# EAGLE board GPS_radiologger_v17 (EAGLE 9.6.2)
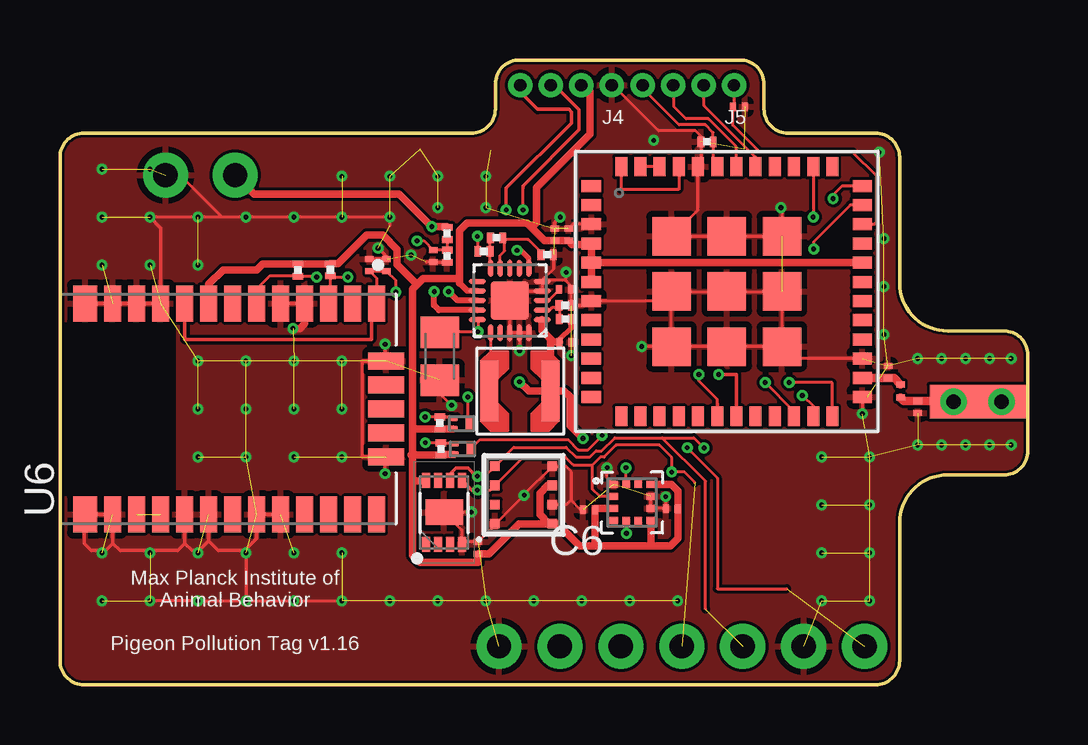
[diagram p0: board, top side]
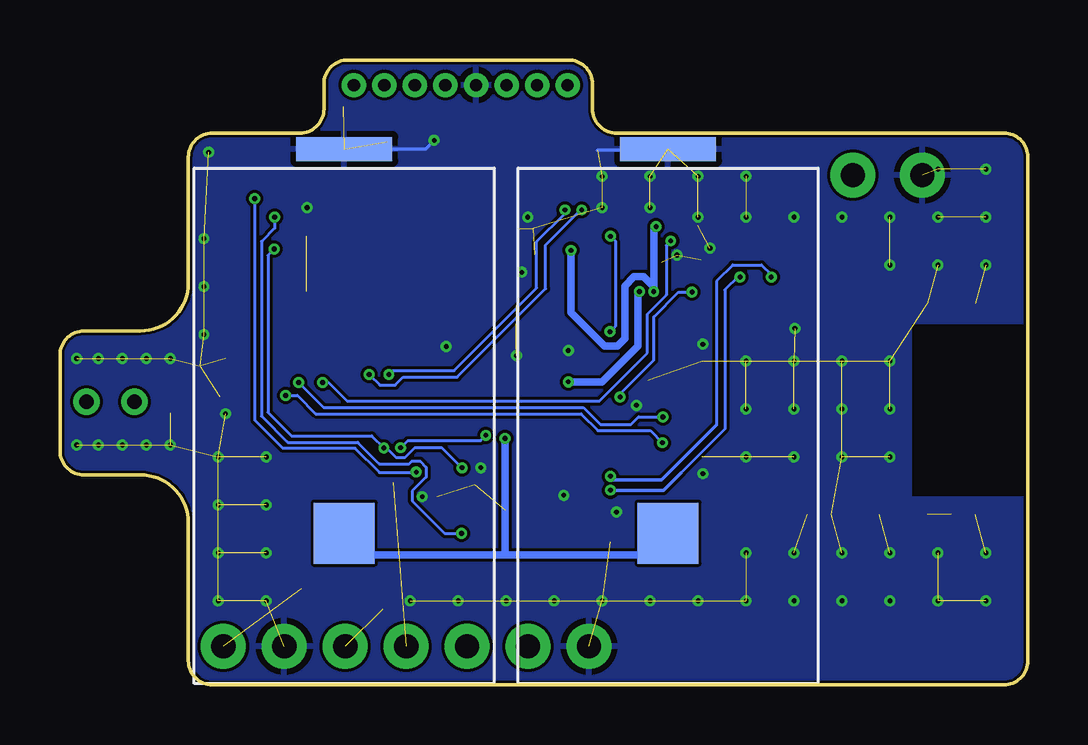
[diagram p1: board, bottom side, seen from below]

Size 40.35 x 26.05 mm. Coordinates in mm from the lower left corner, seen from the top.
Outline: 34,0 1,0 arc-90 0,1 0,22 arc-90 1,23 17.15,23 arc90 18.15,24 18.15,25.05 arc-90 19.15,26.05 28.35,26.05 arc-90 29.35,25.05 29.35,24 arc90 30.35,23 34,23 arc-90 35,22 35,16.75 arc90 37,14.75 39.35,14.75 arc-90 40.35,13.75 40.35,9.75 arc-90 39.35,8.75 37,8.75 arc90 35,6.75 35,1 arc-90 34,0
Copper layers (1*16): Top 0.035mm / dielectric 0.2mm / Bottom 0.035mm
Design rules "default *": minimum track width 5mil, minimum drill 0.2mm, track to track 5mil, track to pad 5mil, pad to pad 5mil, via to via 5mil, smd to smd 5mil, copper to edge 4mil, drill to drill 4mil, minimum pad ring 10mil, minimum via ring 5mil, stop-mask expansion 0mil, vias tented up to drill 12mil, thermal gap 10mil
Net classes: 1 power: width 0.305 mm; 2 antenna: width 0.356 mm, clearance 0.178 mm; 3 battery: width 0.254 mm

## Footprints (pad centres in the part's own frame; a part is rotated, then mirrored left to right if it is on the bottom)
C0201 = smd 0.25 x 0.35: 1 -0.25,0; 2 0.25,0
L0201 = smd 0.25 x 0.35: 1 -0.275,0; 2 0.275,0
C0805K = smd 1.3 x 1.6: 1 -1,0; 2 1,0
SON50P300X200X55-9N = smd 0.63 x 0.32: 1 -1.33,0.75; 2 -1.33,0.25; 3 -1.33,-0.25; 4 -1.33,-0.75; 5 1.33,-0.75; 6 1.33,-0.25; 7 1.33,0.25; 8 1.33,0.75 | smd 1.06 x 1.56: 9 0,0
1X01_NO_SILK = drill 1.016 pad 1.88: 1 0,0
1X04_1.27MM_NO_SILK = drill 0.508 pad 1: 1 0,0; 2 1.27,0; 3 2.54,0; 4 3.81,0
1X07_NO_SILK = drill 1.016 pad 1.88: 1 0,0; 2 2.54,0; 3 5.08,0; 4 7.62,0; 5 10.16,0; 6 12.7,0; 7 15.24,0
SOT883(B) = smd 0.4 x 0.25: 1 -0.35,0.225; 2 -0.35,-0.225 | smd 0.4 x 0.7: 3 0.35,0
R0201 = smd 0.28 x 0.43: 1 -0.255,0; 2 0.255,0
TYPEABZ = smd 0.8 x 0.5: P$1 -5.65,4.4; P$2 -5.65,3.6; P$3 -5.65,2.8; P$4 -5.65,2; P$5 -5.65,1.2; P$6 -5.65,0.4; P$7 -5.65,-0.4; P$8 -5.65,-1.2; P$9 -5.65,-2; P$10 -5.65,-2.8; P$11 -5.65,-3.6; P$12 -5.65,-4.4; P$25 5.65,-4.4; P$26 5.65,-3.6; P$27 5.65,-2.8; P$28 5.65,-2; P$29 5.65,-1.2; P$30 5.65,-0.4; P$31 5.65,0.4; P$32 5.65,1.2; P$33 5.65,2; P$34 5.65,2.8; P$35 5.65,3.6; P$36 5.65,4.4 | smd 0.5 x 0.8: P$13 -4.4,-5.2; P$14 -3.6,-5.2; P$15 -2.8,-5.2; P$16 -2,-5.2; P$17 -1.2,-5.2; P$18 -0.4,-5.2; P$19 0.4,-5.2; P$20 1.2,-5.2; P$21 2,-5.2; P$22 2.8,-5.2; P$23 3.6,-5.2; P$24 4.4,-5.2; P$37 4.4,5.2; P$38 3.6,5.2; P$39 2.8,5.2; P$40 2,5.2; P$41 1.2,5.2; P$42 0.4,5.2; P$43 -0.4,5.2; P$44 -1.2,5.2; P$45 -2,5.2; P$46 -2.8,5.2; P$47 -3.6,5.2; P$48 -4.4,5.2 | smd 1.6 x 1.6: P$49 -2.3,2.3; P$50 0,2.3; P$51 2.3,2.3; P$52 -2.3,0; P$53 0,0; P$54 2.3,0; P$55 -2.3,-2.3; P$56 0,-2.3; P$57 2.3,-2.3
XDCR_BMA400 = smd 0.35 x 0.3: 1 -0.775,0.75; 2 -0.775,0.25; 3 -0.775,-0.25; 4 -0.775,-0.75; 7 0.775,-0.75; 8 0.775,-0.25; 9 0.775,0.25; 10 0.775,0.75 | smd 0.3 x 0.35: 5 -0.25,-0.775; 6 0.25,-0.775; 11 0.25,0.775; 12 -0.25,0.775
SPV1050 = smd 0.7 x 0.2: P$1 -1.35,0.8; P$2 -1.35,0.4; P$3 -1.35,0; P$4 -1.35,-0.4; P$5 -1.35,-0.8; P$11 1.35,-0.8; P$12 1.35,-0.4; P$13 1.35,0; P$14 1.35,0.4; P$15 1.35,0.8 | smd 0.2 x 0.7: P$6 -0.8,-1.35; P$7 -0.4,-1.35; P$8 0,-1.35; P$9 0.4,-1.35; P$10 0.8,-1.35; P$16 0.8,1.35; P$17 0.4,1.35; P$18 0,1.35; P$19 -0.4,1.35; P$20 -0.8,1.35 | smd 1.6 x 1.6: P$21 0,0
LGA3.0X3.0 = smd 0.4 x 0.4: 1 1.2,1.2; 2 1.2,0.4; 3 1.2,-0.4; 4 1.2,-1.2; 5 -1.2,-1.2; 6 -1.2,-0.4; 7 -1.2,0.4; 8 -1.2,1.2
LCC100P960X1400X210-31N = smd 1.5 x 0.7: 1 4.4,-6.2; 2 4.4,-5.2; 3 4.4,-4.2; 4 4.4,-3.2; 5 4.4,-2.2; 6 4.4,-1.2; 7 4.4,-0.2; 8 4.4,0.8; 9 4.4,1.8; 10 4.4,2.8; 11 4.4,3.8; 12 4.4,4.8; 15 -4.4,4.8; 16 -4.4,3.8; 17 -4.4,2.8; 18 -4.4,1.8; 19 -4.4,0.8; 20 -4.4,-0.2; 21 -4.4,-1.2; 22 -4.4,-2.2; 23 -4.4,-3.2; 24 -4.4,-4.2; 25 -4.4,-5.2; 26 -4.4,-6.2 | smd 1.5 x 1: 13 4.4,5.95; 14 -4.4,5.95 | smd 0.7 x 1.5: 27 -2,-6.6; 28 -1,-6.6; 29 0,-6.6; 30 1,-6.6; 31 2,-6.6
LPS_3015 = smd 0.75 x 2.54: P$1 -1.3,0; P$2 1.25,0
ICARUS_NITINOL_ANTENNA_SHORT = smd 4 x 1.4: 1 0,0 | drill 0.6: 2 -1,0; 3 1,0
ICARUS_FULL_TOP = smd 2.54 x 2.54: P$1 0,-4.48 | smd 4 x 1: P$2 0,11.538

## Placement (x,y rotation side)
C1  0.1 uF  [C0201]  28.3,24.1 0 top
C2  47 uF  [C0201]  13.6,17.5 90 top
C3  0.1 uF  [C0201]  17.42,5.71 90 top
C4  10nF  [C0201]  21.05,16.48 0 top
C5  100 nF  [C0201]  12.9,17.5 90 top
C6  [C0201]  22.05,7.3 180 top
C7  0.1 uF  [C0201]  15.56,17.87 270 top
C8  [C0201]  25.51,7.35 180 top
C9  1 uF  [C0201]  20.62,18.77 270 top
C10  0.1 uF  [C0201]  21.2,18.77 270 top
C11  0.1uF  [L0201]  35.04,12.25 90 top
C13  47 uF  [C0805K]  15.83,13.7 270 top
C14  4.7 uF  [C0201]  21.08,14.28 0 top
IC4  CAT24M01HU5I-GT3  [SON50P300X200X55-9N]  16.01,7.19 90 top
J1  [1X01_NO_SILK]  7.3,21.25 0 top
J3  [1X01_NO_SILK]  4.4,21.25 0 top
J4  [1X04_1.27MM_NO_SILK]  23,25 180 top
J5  [1X04_1.27MM_NO_SILK]  28.1,25 180 top
J7  [1X07_NO_SILK]  18.3,1.6 0 top
L3  [C0201]  34.52,13.03 90 top
L4  [C0201]  35.76,11.58 270 top
PDTA143TMB,1  TINYPICO-PNPAMB  [SOT883(B)]  16.78,9.83 0 top
PDTA143TMB,315  TINYPICO-PNPAMB  [SOT883(B)]  16.74,10.89 0 top
R1  4.7 k  [R0201]  11.27,17.3 90 top
R2  4.7 k  [R0201]  9.92,17.29 90 top
R3  10k  [R0201]  26.97,22.64 0 top
R4  100k  [R0201]  15.83,10.91 270 top
R5  100k  [R0201]  15.88,9.83 270 top
R6  10 M  [R0201]  16.14,17.87 90 top
R7  4.7 M  [R0201]  16.14,18.82 90 top
R8  3M  [R0201]  21.07,15.25 0 top
R9  9.1M  [R0201]  21.06,15.82 180 top
R10  6.2M  [R0201]  17.67,18.07 180 top
R11  1M  [R0201]  18.2,18.64 180 top
R12  3M  [R0201]  20.31,17.93 180 top
U1  TYPEABZ  [TYPEABZ]  27.8,16.4 0 top
U2  BMA400  [XDCR_BMA400]  23.85,7.6 0 top
U4  SPV1050  [SPV1050]  18.75,16.02 180 top
U5  BME680BME680  [LGA3.0X3.0]  19.33,7.91 180 top
U6  CAM-M8Q-0  [LCC100P960X1400X210-31N]  7,11.5 90 top
U$1  LPS3015  [LPS_3015]  19.14,12.24 180 top
U$2  NITINOL_ANTENNA_SHORT  [ICARUS_NITINOL_ANTENNA_SHORT]  38.25,11.8 0 top
U$3  ICARUS_V4_RAW  [ICARUS_FULL_TOP]  28.5,10.8 0 bottom
U$4  ICARUS_V4_RAW  [ICARUS_FULL_TOP]  15,10.8 0 bottom

## Library data of the parts
C1-C10 C13 C14 L3 L4 = rcl; SPICEPREFIX: C
C11 = rcl; SPICEPREFIX: L
IC4 = CAT24M01HU5I-GT3-CorrectedV2; ALLIED_NUMBER: 70300250; ALLIED_PRICE-STOCK: http://www.alliedelec.com/on-semiconductor-cat24m01hu5i-gt3/70300250/; DESCRIPTION: EEPROM 1MB I2C SERIAL EEPROM; HEIGHT: 0.55mm; MANUFACTURER_NAME: ON Semiconductor; MANUFACTURER_PART_NUMBER: CAT24M01HU5I-GT3; MOUSER_PART_NUMBER: 863-CAT24M01HU5I-GT3; MOUSER_PRICE-STOCK: https://www.mouser.com/Search/Refine.aspx?Keyword=863-CAT24M01HU5I-GT3; RS_PART_NUMBER: 7814831P; RS_PRICE-STOCK: http://uk.rs-online.com/web/p/products/7814831P
J1 J3-J5 J7 = SparkFun-Connectors
PDTA143TMB,1 PDTA143TMB,315 = UnexpectedMaker
R1-R12 = rcl; SPICEPREFIX: R
U1 = Kris
U2 = BMA400; AVAILABILITY: Unavailable; DESCRIPTION: Accelerometer X, Y, Z Axis ±2g, 4g, 8g, 16g 12-LGA (2x2); MF: Bosch Sensortec; MP: BMA400; PACKAGE: LGA-12 Bosch Tools; PRICE: None
U4 = STM-SPV1050_V2
U5 = SparkFun-Sensors; PROD_ID: IC-14656
U6 = CAM-M8Q-0; AVAILABILITY: Unavailable; DESCRIPTION: CAM-M8 RF Receiver BeiDou, GLONASS, GNSS, GPS 1.575GHz -167dBm On-Board, Chip Module; MF: U-Blox America; MP: CAM-M8Q-0; PACKAGE: SMD-31 u-blox; PRICE: None
U$1 = coilcraft_custom
U$2 = Antenna_mounts
U$3 U$4 = TrisolX_Solar_Cells

## Nets
ACC_INT: U1.P$38 U2.5
BAT [battery]: J1.1 R7.2 U4.P$6 U4.P$14
BOOT: J5.4 R3.2 U1.P$43
DM: U1.P$2
DP: U1.P$1
GND: C1.2 C2.2 C3.2 C4.2 C5.2 C6.2 C7.2 C8.2 C9.1 C10.1 C13.2 C14.2 IC4.4 IC4.9 J3.1 J4.1 J7.1 J7.6 L3.2 L4.2 R3.1 R6.1 R9.1 R12.1 U1.P$3 U1.P$7 U1.P$25 U1.P$27 U1.P$44 U1.P$49 U1.P$50 U1.P$51 U1.P$52 U1.P$53 U1.P$54 U1.P$55 U1.P$56 U1.P$57 U2.1 U2.8 U2.9 U4.P$4 U4.P$5 U4.P$18 U4.P$19 U4.P$20 U4.P$21 U5.1 U5.5 U5.7 U6.4 U6.5 U6.10 U6.11 U6.12 U6.13 U6.14 U6.15 U6.18 U6.19 U6.21 U6.22 U6.27 U6.31 U$3.P$2 U$4.P$2
N$1: U1.P$45 U1.P$48
N$2 [antenna]: C11.2 L3.1 U1.P$26
N$4: U4.P$16 U$1.P$2
N$6: R8.1 R9.2 U4.P$2
N$7 [battery]: C14.1 R8.2 U4.P$1 U4.P$13 U$1.P$1 U$3.P$1 U$4.P$1
N$8: R10.1 R11.2 U4.P$10
N$9: R11.1 R12.2 U4.P$9
N$11 [antenna]: C11.1 L4.1 U$2.1 U$2.2 U$2.3
N$12: C13.1 R10.2 U4.P$15
N$13: C4.1 U4.P$3
N$16: U6.16 U6.17
POWER [power]: C3.1 C6.1 C8.1 C9.2 C10.2 IC4.8 J4.2 PDTA143TMB,1.2 PDTA143TMB,315.2 R1.2 R2.2 R4.2 R5.2 U1.P$4 U1.P$5 U1.P$6 U1.P$32 U2.3 U2.7 U2.10 U4.P$12 U5.6 U5.8 U6.8
PWM: J7.2
RDY: J7.3
RST: C1.1 J5.1 U1.P$34
RX: J4.3 U1.P$18
SCD_PDTA: PDTA143TMB,1.1 R5.1 U1.P$23
SCD_PWR: J7.7 PDTA143TMB,1.3
SCL: IC4.6 J7.5 R2.1 U1.P$35 U2.12 U5.4 U6.6
SDA: IC4.5 J7.4 R1.1 U1.P$36 U2.2 U5.3 U6.3
SWDCLK: J5.3 U1.P$42
SWDIO: J5.2 U1.P$41
TCXO_OUT: U1.P$46 U1.P$47
TX: J4.4 U1.P$19
VBUS: U1.P$20
VOLT_MEAS: C7.1 R6.2 R7.1 U1.P$22
ZOE_PDTA: PDTA143TMB,315.1 R4.1 U1.P$24
ZOE_PWR: C2.1 C5.1 PDTA143TMB,315.3 U6.1 U6.9

## Tracks (layer width: path | path; a pad name or v marks a point on that pad's centre or on a via)
ACC_INT  (via drill 0.2)
  Top 0.127: U1.P$38 v31.4,19.5 | U2.5 v23.6,6.32 v23.61,6.31
  Bottom 0.127: v31.4,19.5 31.4,19.03 31.95,18.48 31.95,11.2 30.86,10.11 27.94,10.11 27.04,9.21 25.79,9.21 25.68,9.32 25.34,9.32 25.08,9.07 25.08,8.66 25.67,8.08 25.67,7.67 24.31,6.31 v23.61,6.31
BAT  (via drill 0.2)
  Top 0.127: 15.53,19.07 v15.5,19.1
  Top 0.203: v19.05,18.11 19.2,18.11 19.55,17.77 U4.P$6 | v15.59,16.39 v15.6,16.4
  Top 0.254: U4.P$14 15.8,15.62 15.59,15.83 v15.59,16.39
  Top 0.305: J1.1 8.1,20.45 14.13,20.45 15.51,19.07 15.53,19.07 | v15.5,19.1 16.11,19.1 R7.2
  Bottom 0.127: v15.6,16.4 v15.61,16.4
  Bottom 0.305: v15.5,19.1 15.6,19 v15.6,16.4 15.6,16.58 16.03,17.01 16.42,17.01 16.8,16.63 16.8,14.44 17.11,14.13 17.66,14.13 19.05,15.52 v19.05,18.11
BOOT
  Top 0.127: U1.P$43 27.23,21.6 R3.2 27.23,23.02 26.9,23.35 25.8,23.35 24.3,24.85 24.3,25.19 J5.4
GND  (via drill 0.2)  (84 unrouted)
  Top 0.127: C4.2 21.35,16.48 | 21.95,15.8 U1.P$7 25.1,16 U1.P$52 | R9.1 21.32,16.46 C4.2 | U4.P$20 U4.P$19 | U4.P$19 U4.P$18 U4.P$21 19.11,16.39 | R12.1 20.57,17.33 20.1,16.86 U4.P$5 | 19.15,16.42 19.11,16.39 | U4.P$5 20.15,16.87 21.05,16.87 | 21.05,16.87 21.1,16.87 v21.1,17.2 | 21.05,16.87 21.3,16.62 C4.2 | C5.2 C2.2 13.63,17.72 | 20.53,7.57 U5.7 21.1,7.5 21.3,7.7 | U1.P$52 U1.P$53 U1.P$54 U1.P$57 | U1.P$57 U1.P$56 U1.P$55 | U1.P$55 U1.P$52 | IC4.9 16.76,6.44 IC4.4 16.86,5.96 C3.2 18.13,6.67 U5.1 18.16,6.71 v19.35,7.9 19.35,7.93 U5.5 21.09,9.11 21.3,8.9 21.3,7.7 | 16.14,7.06 IC4.9 | C10.1 21.39,19.2 U1.P$3 | v3.75,3.5 v5.75,3.5 v7.75,3.5 v9.75,3.5 v11.75,3.5 | R6.1 C7.2 15.27,17.62 | J4.1 23.05,25.15 23.05,25 24.96,23.09 26.5,23.09 26.7,22.89 26.7,22.66 R3.1 26.71,21.6 U1.P$44 26.6,19.8 U1.P$49 U1.P$50 U1.P$51 30.1,19.85 v30.05,19.9 | 19.11,16.39 20.07,16.39 U4.P$4 U4.P$5 | v21.33,13.73 v21.32,13.72 | 16.15,12.38 C13.2 15.83,12.14 v16.32,11.65 | U1.P$25 | U1.P$25 v33.45,11.3 | U1.P$55 v24.25,14.1 | v17.15,7.2 17.14,7.19 IC4.9 | v13.55,8.8 13.55,9.45 13.5,9.5 | U1.P$27 30.6,13.6 U1.P$57 | v7.75,19.5 v9.75,19.5 v11.75,19.5 v13.75,19.5 13.75,19.13 | v7.75,19.5 v5.75,19.5 v3.75,19.5 | v7.75,19.5 6.75,19.5 4.97,21.28 J3.1 | 33.66,12 U1.P$25 | U4.P$19 v19.16,13.93 | U2.9 U2.8 C8.2 v25.26,7.83 v25.25,7.84 | C6.2 21.7,7.3 21.3,7.7 | U2.1 22.81,8.62 v22.81,9.05
  Top 0.152: U6.27 13.5,9.5 12.6,9.5 12.6,13.5 U6.31 13.55,13.5 v13.55,14.2 | U6.22 U6.21 8.2,6.1 7.7,5.6 | 7.7,5.6 6.6,5.6 6.2,6 | 6.2,6 U6.19 | 6.2,6 5.8,5.6 5.5,5.6 5.2,5.9 | 5.2,5.9 U6.18 | 5.2,5.9 4.9,5.6 2.5,5.6 2.2,5.9 | 2.2,5.9 U6.15 U6.14 1,7.05 1,5.9 1.3,5.6 1.9,5.6 2.2,5.9 | U6.13 U6.12 U6.11 U6.10 4.2,19.05 v3.75,19.5 | U6.4 U6.5 | 21.39,15.9 R9.1 21.97,15.82 U1.P$7 | 7.7,5.6 7.75,5.55 v7.75,3.5 | C2.2 13.6,17.87 v13.26,18.21 | C9.1 20.62,19.27 v20.85,19.5
  Top 0.305: U6.4 10.2,15.06 10,14.86 v9.71,14.86
  Bottom 0.152: v24.75,22.7 25.11,22.34 U$3.P$2 | 17.95,22.3 15.16,22.3 U$4.P$2
  other vias: 31.75,3.5 36.75,10 38.75,10 36.75,13.6 38.75,13.6 37.75,13.6 35.75,13.6 37.75,10 35.75,10 14.63,17.91 1.75,19.5 3.75,17.5 1.75,17.5 1.75,21.5 3.75,21.5 3.75,5.5 5.75,5.5 1.75,3.5 1.75,5.5 7.75,5.5 7.75,9.5 7.75,11.5 7.75,13.5 5.75,13.5 5.75,11.5 5.75,9.5 9.75,9.5 11.75,9.5 11.75,11.5 9.75,11.5 9.75,13.5 11.75,13.5 9.75,5.5 11.75,5.5 5.75,17.5 13.75,3.5 15.75,3.5 17.75,3.5 19.75,3.5 21.75,3.5 23.75,3.5 25.75,3.5 33.75,3.5 33.75,5.5 33.75,7.5 33.75,9.5 31.75,7.5 31.75,5.5 31.75,9.5 17.75,21.2 34.15,22.2 34.35,18.6 34.35,16.6 34.35,14.6 39.65,13.6 39.65,10 15.75,21.2 13.75,21.2 11.75,21.2 15.75,19.9 17.75,19.9
  pour Top: -1.1,26.95 40.65,26.95 40.65,-0.75 -1.6,-0.75 -1.6,7.8 4.9,7.8 4.9,15.1 -1.1,15.1
  pour Bottom: -0.78,27.2 40.6,27.2 40.6,-0.7 -0.4,-0.7 -0.4,7.8 4.9,7.8 4.9,15.1 -0.78,15.1
N$1
  Top 0.127: U1.P$45 25.8,20.65 23.4,20.65 U1.P$48
N$2
  Top 0.356: U1.P$26 34.5,12.8 L3.1 34.78,12.78 C11.2
N$4
  Top 0.127: 17.97,14.65 U4.P$16 17.95,12.36 17.89,12.3 | U$1.P$2 17.89,12.3 | 17.89,12.3 17.89,12.48
N$6
  Top 0.127: R8.1 20.82,15.81 R9.2 20.73,15.82 20.64,15.72 20.52,15.72 20.42,15.62 U4.P$2
N$7  (via drill 0.2)
  Top 0.203: 21.32,14.9 20.83,14.4 C14.1
  Top 0.254: U4.P$13 16.58,16.02 v16.2,16.4 | 21.32,14.9 R8.2
  Top 0.305: U$1.P$1 19.55,12.24 v19.16,12.63 | v21.8,10.27 21.25,10.82 21.25,12.01 21.02,12.24 U$1.P$1 | U4.P$1 20.1,14.76 20.44,14.42 | 20.44,14.42 20.58,14.28 C14.1 | U$1.P$1 20.44,14.42
  Bottom 0.305: U$4.P$1 15.71,5.41 21.8,5.41 | 21.8,5.41 27.61,5.41 28.5,6.3 U$3.P$1 | v21.8,10.27 21.8,5.41 | v16.2,16.4 16.25,16.35 16.25,14.13 17.75,12.63 v19.16,12.63
N$8
  Top 0.127: U4.P$10 17.93,17.39 R10.1 17.93,18.62 R11.2
N$9
  Top 0.127: R12.2 20.05,18.03 19.52,18.56 18.54,18.56 | R11.1 18.54,18.56 | U4.P$9 18.35,17.9 18.54,18.09 18.54,18.56
N$11
  Top 0.356: C11.1 35.18,11.83 L4.1 37.22,11.83 U$2.2 U$2.1 U$2.3
N$12  (via drill 0.2)
  Top 0.127: U4.P$15 17.42,15.2 v17.42,14.72 17.4,14.7 C13.1 | v17.4,18.7 17.41,18.68 R10.2
  Bottom 0.127: v17.42,14.72 17.2,14.94 17.2,18.5 v17.4,18.7
N$13
  Top 0.127: U4.P$3 20.12,16 20.34,16 20.8,16.46 C4.1
N$16  (1 unrouted)
POWER
  Top 0.254: U4.P$12 16.98,16.42 16.66,16.74
  Top 0.305: C9.2 C10.2 21.35,18.36 22.11,18.36 U1.P$4 U1.P$5 | C9.2 20.8,18.52 | U6.8 6.2,16.7 6.8,17.3 8.21,17.3 8.45,17.55 R2.2 R1.2 11.6,17.55 12.78,18.74 13.46,18.74 14.06,18.14 14.06,17.52 14.89,16.69 | U5.8 20.7,6.71 | U1.P$5 U1.P$6 | U5.8 19.13,6.71 17.88,5.46 C3.1 17.42,5.1 15,5.1 14.7,5.4 14.7,8.5 | C9.2 20.2,18.52 19.66,19.06 | 19.66,19.06 19.47,19.25 16.97,19.25 16.66,18.94 16.66,16.94 | 16.66,16.74 16.66,16.94 | 14.7,8.5 15.24,8.5 IC4.8 | 14.7,10.65 14.7,16.5 14.89,16.69 | PDTA143TMB,315.2 16.38,10.65 R4.2 14.7,10.65 | PDTA143TMB,1.2 15.91,9.61 R5.2 14.63,9.57 | 16.66,16.94 15.14,16.94 14.89,16.69 | U5.8 20.39,6.71 20,7.1 20,7.98 20.33,8.31 U5.6 | U1.P$32 U1.P$5 | 19.66,19.06 19.87,19.27 19.87,20.73 22.1,22.96 22.1,24.75 J4.2 | 14.7,10.65 14.7,9.65 14.63,9.58 14.63,9.57 | 14.63,9.57 14.7,9.5 14.7,8.5 | U5.8 20.74,6.71 21.65,5.8 22.3,5.8 | U2.3 22.3,7.35 C6.1 22.3,5.8 | 22.3,5.8 24.63,5.8 | 24.63,5.8 25.45,5.8 25.76,6.11 C8.1 25.76,8.08 25.49,8.35 U2.10 | U2.7 24.62,5.8 24.63,5.8
RST
  Top 0.127: U1.P$34 33.95,19.2 34.05,19.3 34.05,21.2 33.04,22.21 29.17,22.21 28.05,23.33 C1.1 28.1,24.15 J5.1
RX  (via drill 0.2)
  Top 0.127: v19.3,19.8 19.3,20.7 | 27.4,11.7 27.4,11.9 26.64,12.66 v26.64,12.94 | 20.61,25 J4.3
  Top 0.152: U1.P$18 27.4,11.7 | 19.3,20.7 19.3,20.8 21.64,23.14 21.64,23.97 20.61,25
  Bottom 0.127: v26.64,12.94 26.48,13.1 23.92,13.1 20.48,16.54 20.48,18.47 19.3,19.65 v19.3,19.8
SCD_PDTA  (via drill 0.2)
  Top 0.127: PDTA143TMB,1.1 15.91,10.05 R5.1 v15.23,10.09 | v30.95,12.06 31.4,11.62 U1.P$23
  Bottom 0.127: v30.95,12.06 30.45,12.06 29.68,11.3 18.62,11.3 17.92,10.6 15.74,10.6 v15.23,10.09
SCD_PWR  (via drill 0.2)  (1 unrouted)
  Top 0.127: PDTA143TMB,1.3 17.52,10.22 21.18,10.22 21.6,9.8 22.02,9.8 22.6,10.38 v22.6,10.4 | v26.15,9.88 27.4,8.63 27.4,4 30.3,4
  Bottom 0.127: v22.6,10.4 22.82,10.18 25.85,10.18 v26.15,9.88
SCL  (via drill 0.2)  (1 unrouted)
  Top 0.127: U1.P$35 32.95,20 31.42,18.47 v31.42,18.17 | 17.67,8.65 U5.4 18.92,9.9 21.1,9.9 21.5,9.5 22.1,9.5 22.35,9.75 22.58,9.75 23.13,10.3 25.1,10.3 | 16.26,8.69 IC4.6 | 8.2,16.5 8.73,17.04 R2.1 10.77,17.04 10.8,17 v10.7,17 | 25.1,10.3 26.91,8.49 26.91,3.15 | U2.12 23.6,8.96 23.59,8.96 v23.59,9.05 | 25.1,10.3 26.42,10.3 v26.85,9.87
  Top 0.152: U6.6 8.2,16.5 | 16.26,8.69 16.26,8.78 16.52,9.04 17.01,9.04 17.35,8.69 v17.4,8.69 17.44,8.65 17.67,8.65
  Bottom 0.127: 31.4,18.17 v31.42,18.17 31.68,17.91 31.68,11.36 30.7,10.38 27.36,10.38 v26.85,9.87 26.73,9.87 26.32,9.46 25.98,9.46 25.56,9.88 24.43,9.88 v23.59,9.05 | v10.7,17 10.7,17.1 11.1,17.5 12.3,17.5 12.98,16.82 12.98,10.84
  Bottom 0.152: 12.98,10.84 15.27,8.54 17.25,8.54 v17.4,8.69
SDA  (via drill 0.2)  (1 unrouted)
  Top 0.127: U1.P$36 32.6,20.8 32.15,20.35 v32.23,20.27 | 26.47,8.43 26.04,8.87 v25.5,8.87 25.5,9.47 24.98,9.99 23.18,9.99 22.68,9.5 22.53,9.5 22.2,9.16 | 17.5,8.11 17.93,8.11 U5.3 19.32,9.5 21.06,9.5 21.39,9.16 22.2,9.16 | U6.3 11.27,15.97 R1.1 11.31,17 v12,17 | U2.2 22.5,7.85 22.2,8.15 22.2,9.16
  Top 0.152: 17.5,8.11 v17.4,8.11 17.17,8.11 IC4.5
  Bottom 0.127: v12,17 12.1,17 12.63,16.47 12.63,10.66 14.46,8.84 | v25.5,8.87 25.52,8.85 27.04,8.85 28.05,9.86 31.06,9.86 32.23,11.03 v32.23,20.27
  Bottom 0.152: 14.46,8.84 15.19,8.11 v17.4,8.11
SWDCLK
  Top 0.127: U1.P$42 28.2,22.43 27.03,23.6 26.1,23.6 25.6,24.1 25.6,25.16 J5.3
SWDIO
  Top 0.127: J5.2 26.85,25.18 26.85,24.15 29,22 U1.P$41
TCXO_OUT
  Top 0.127: U1.P$46 U1.P$47
TX  (via drill 0.2)
  Top 0.152: U1.P$19 28.2,12.94 v27.46,12.94 | v18.6,19.8 18.6,20.7 21.32,23.42 21.32,23.88 21.21,23.99 19.91,23.99 19.19,24.71 J4.4
  Bottom 0.127: v18.6,19.8 18.64,19.8 20.11,18.34 20.11,16.52 23.79,12.83 26.04,12.83 26.38,12.49 27.01,12.49 v27.46,12.94
VOLT_MEAS  (via drill 0.2)
  Top 0.127: R7.1 R6.2 C7.1 15.17,18.51 v14.89,18.51 | U1.P$22 30.6,11.4 v29.4,12.6
  Bottom 0.127: v29.4,12.6 29.15,12.6 28.38,11.83 17.87,11.83 15.87,13.84 15.87,15.45 15.07,16.25 15.07,18.33 v14.89,18.51
ZOE_PDTA  (via drill 0.2)
  Top 0.127: U1.P$24 32.2,12.6 v30.4,12.6 | 15.28,11.23 v15.22,11.17 15.35,11.29 15.47,11.16 R4.1
  Top 0.152: PDTA143TMB,315.1 16.34,11.16 R4.1
  Bottom 0.127: v30.4,12.6 29.36,11.56 18.53,11.56 17.82,10.85 16.55,10.85 16.23,11.17 v15.22,11.17
ZOE_PWR  (via drill 0.2)
  Top 0.127: PDTA143TMB,315.3 17,10.98 v17,12 | C5.1 13.2,16.95 U6.1 | C2.1 14,16.85 v14,16.37
  Top 0.152: U6.9 5.2,14.4 12.98,14.4 12.98,15.68 U6.1 | C2.1 C5.1
  Bottom 0.127: v17,12 17,12.13 15.59,13.54 15.59,15.34 14.56,16.37 v14,16.37

## Text on the board
tPlace: Max Planck Institute of / Animal Behavior / / Pigeon Pollution Tag v1.16
tValues: - | +